# Altium PCB AOZ2262AQI-18_PCB.PcbDoc
Units mil, origin at the board's own origin, x right, y up, seen from the top; angles counter-clockwise.
Board outline 950 x 1115 mil, 2 copper layers (Top Layer, Bottom Layer); 13 components, 11 nets, 50 pads, 29 vias.
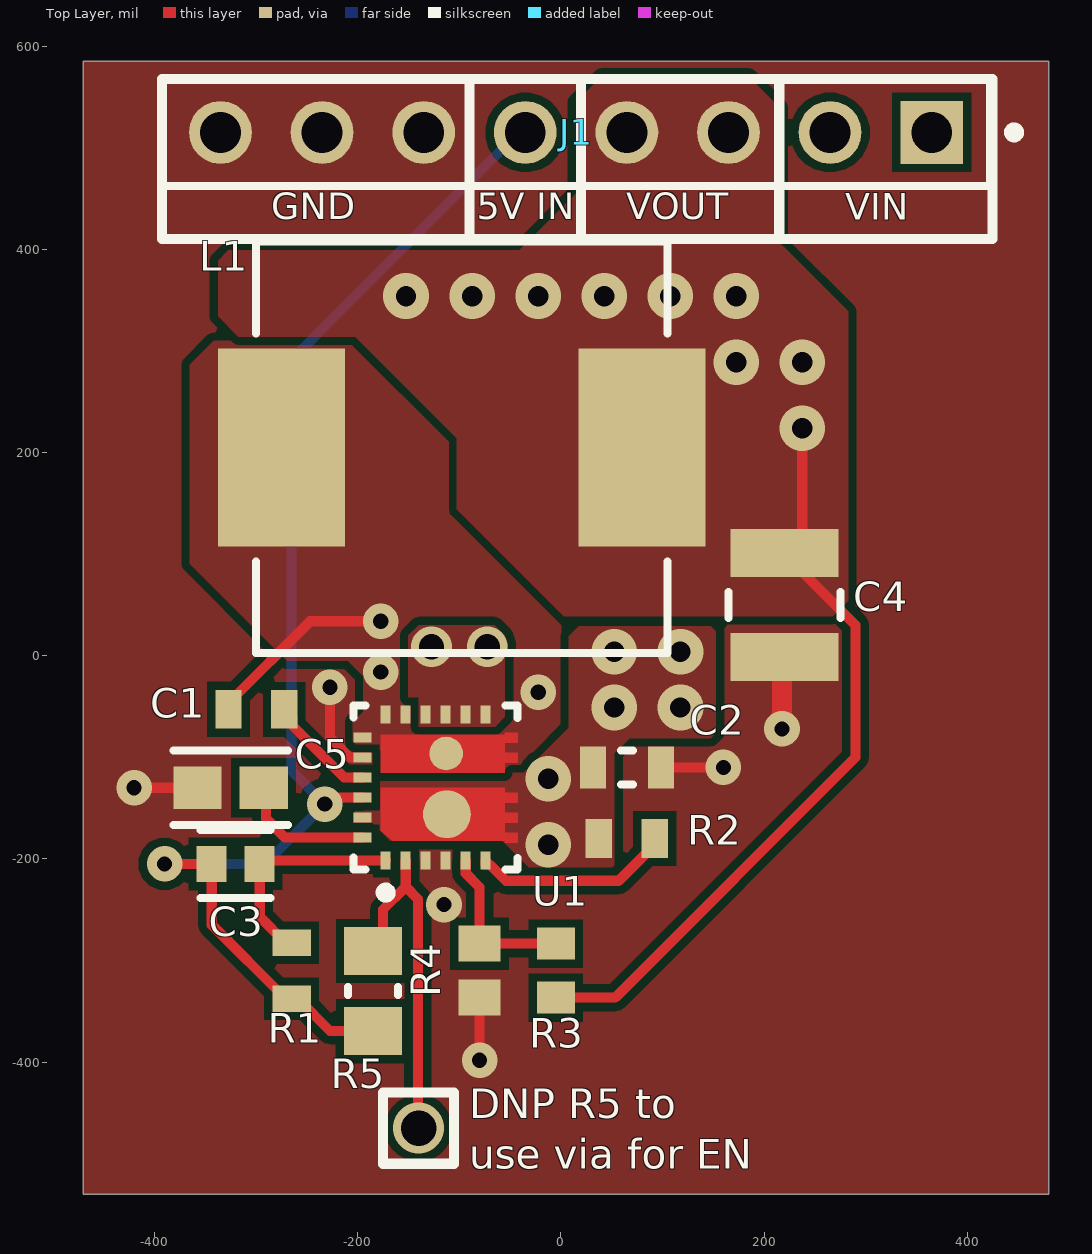
[diagram p0: Top Layer view]
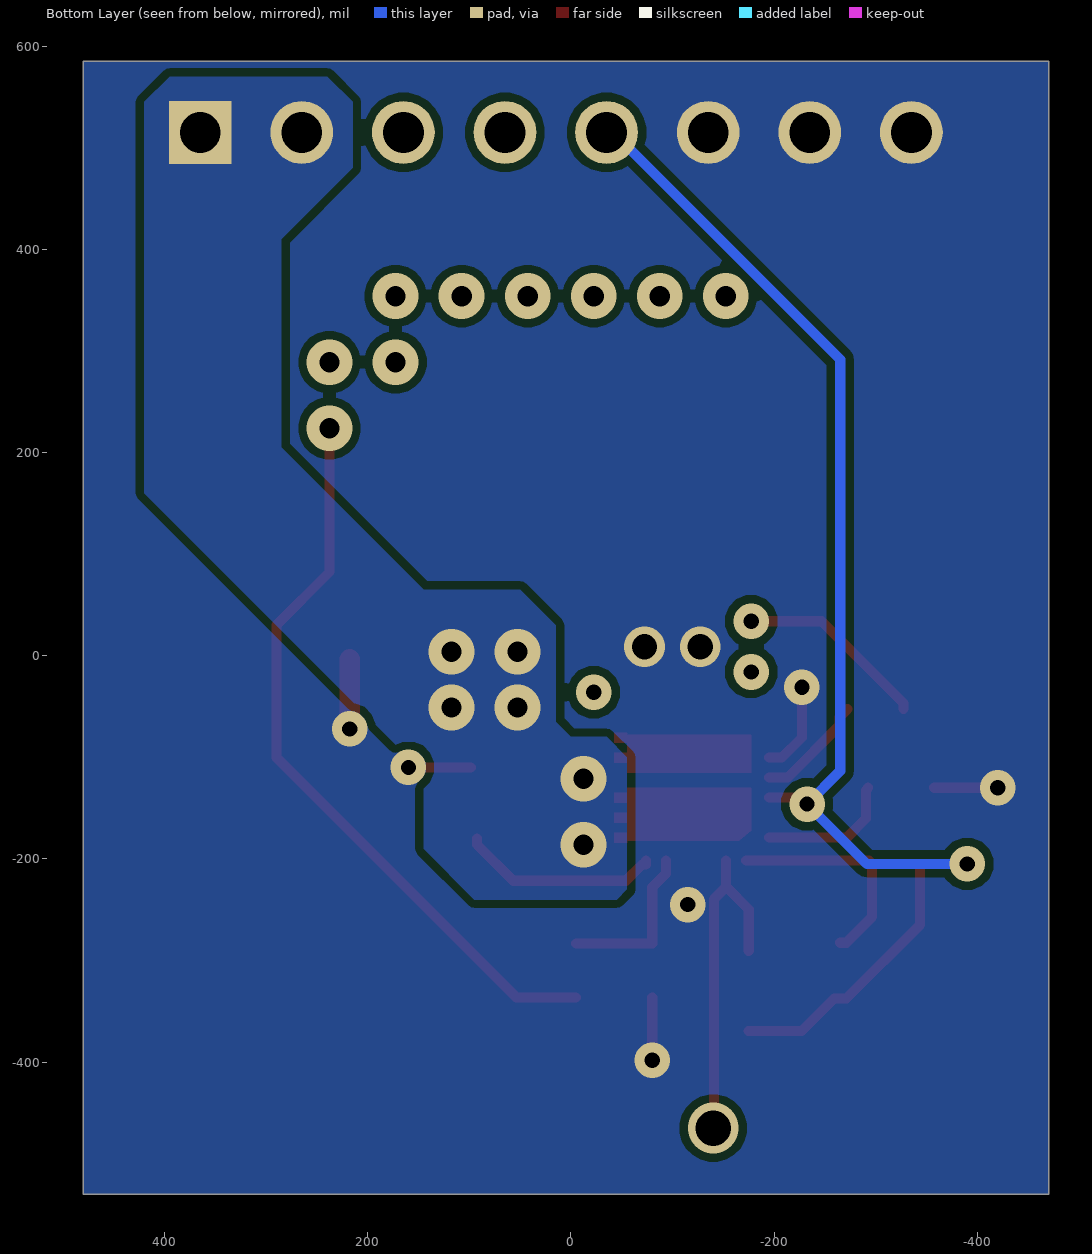
[diagram p1: Bottom Layer view, seen from below]
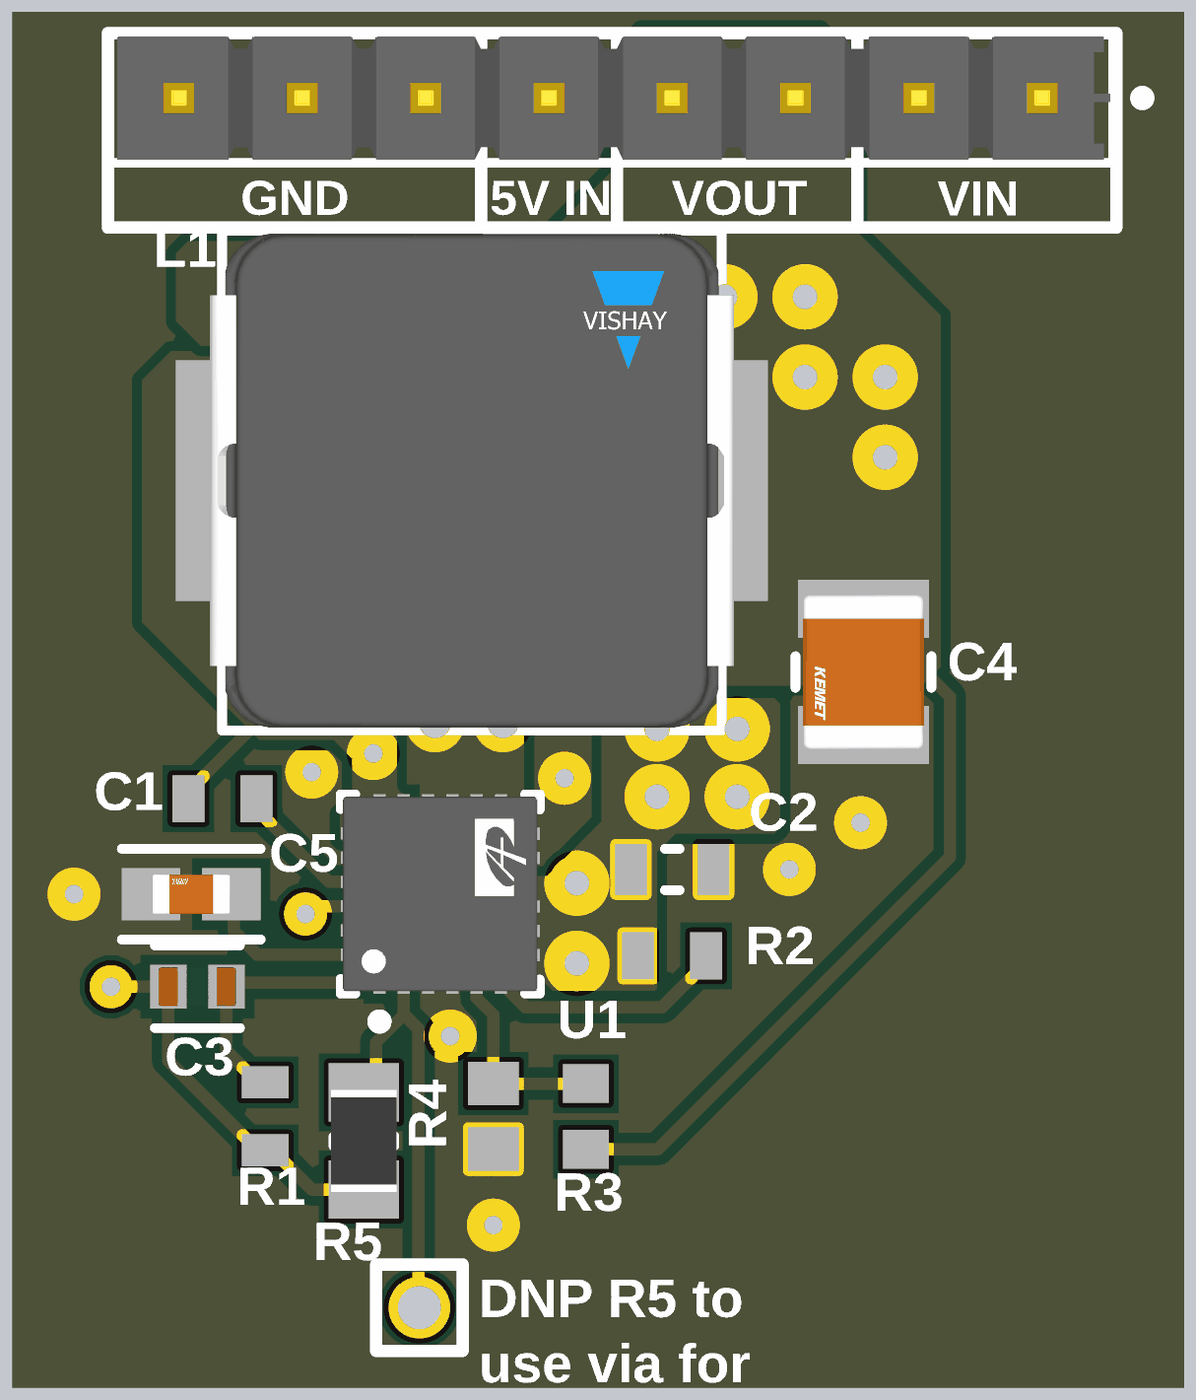
[diagram p2: 3D render of the assembled board from above, using the file's embedded part models]

## Layer stack, top to bottom
Top Solder: solder mask 0.4, Solder Resist, Dk 3.5
Top Layer: signal copper 1.4
Dielectric 1: dielectric 12.6, FR-4, Dk 4.8
Bottom Layer: signal copper 1.4
Bottom Solder: solder mask 0.4, Solder Resist, Dk 3.5

## Board outline
-470,-530 -470,585 480,585 480,-530

## Design rules (kind name [scope] priority, off if disabled: settings)
Clearance [All] p1: gap=8 ignorepadtopadclearanceinfootprint=TRUE except(0: Arc-Hole Track-Hole SMDPad-Hole THPad-Hole Via-Hole Fill-Hole Poly-Hole Region-Hole Text-Hole)
PolygonConnect [All] p1: connectstyle=Direct reliefconductorwidth=10 reliefentries=4 polygonreliefangle="90 Angle" airgapwidth=10
RoutingVias [All] p1: holewidth=15 width=35 viastyle="Through Hole" minholewidth=15 minwidth=35 maxholewidth=28 maxwidth=50
SolderMaskExpansion [All] p1: expansion=4 istentingtop=FALSE
Width [All] p1: maxlimit=100 minlimit=10 preferedwidth=10
30 further rules are at their usual default settings.

## Components (designator, comment, footprint, x,y, rotation, side; value= is the part's Value field where it differs from the comment)
C1 "100nF" 0603 -299.63,-52.61 r0 top
C2 "22uF" CAPC1608X100X20ML10 65,-110 r0 top
C3 "4.7uF" FP-C0603-CG-MFG -320,-205 r0 top
C4 "100uF" FP-C1210C107M9PACTU-MFG 220,50 r270 top
C5 "1nF" FP-0603-L_1_6_0_15-W_0_81-IPC_A -325,-130 r180 top
J1 "TSW-108-08-G-S" FP-TSW-108-08-G-S-MFG 15,515 r180 top
L1 "1uH" FP-IHLP-4040DZ-FP_3_175x4-MFG -97.5,205 r0 top
R1 "100K" 0603 -265,-310 r90 top
R2 "88K7 1%" 0603 65,-180 r0 top value="88700.00 Ohm"
R3 "105K" RESC1608X55X30NL15T15 -5,-310 r270 top
R4 "20K" RESC1609X50X30ML10T20 -80,-310 r90 top
R5 "0R" RESC2013X60X35ML10T20 -185,-330 r270 top
U1 "AOZ2262AQI-18" FP-QFN4x4B_23L_EP2_S-MFG -123.15,-129.84 r90 top

## Footprints (in the part's own frame and the unit in brackets; to place one, negate y for a bottom-side part, rotate by r counter-clockwise, add the part's x,y. Pads: shape width x height; smd on the part's side, far side on the other; paste and mask are expansions set on the pad)
0603 [mil]
  rect 26x38 smd: 1(-27.5,0) 2(27.5,0)
  body extent 0,0 10,10, height 10
CAPC1608X100X20ML10 [mm] "Chip Capacitor, 2-Leads, Body 1.70x0.90mm, IPC Low Density"
  rect 0.65x1.05 smd: 1(-0.85,0) 2(0.85,0)
  silkscreen extent -0.15,-0.43 0.15,0.43, body extent -0.85,-0.45 0.85,0.45, height 1
FP-0603-L_1_6_0_15-W_0_81-IPC_A [mil]
  rect 47.5x42.06 smd paste+0 mask+0: 1(-32.51,0) 2(32.51,0)
  silkscreen extent -56,-37 56,37, body extent -76,-41 76,41, height 10
FP-C0603-CG-MFG [mm]
  rect 0.75x0.9 smd paste+0 mask+0: 1(-0.6,0) 2(0.6,0)
  silkscreen extent -0.87,-0.85 0.87,0.85, body extent -1.2,-0.6 1.2,0.6, height 0.25
FP-C1210C107M9PACTU-MFG [mm]
  rect 1.2x2.7 smd paste+0 mask+0: 1(-1.3,0) 2(1.3,0)
  silkscreen extent -0.33,-1.4 0.33,1.4, body extent -2,-1.5 2,1.5, height 0.25
FP-IHLP-4040DZ-FP_3_175x4-MFG [mil]
  rect 125x195 smd paste+0 mask+0: 1(-177.5,0) 2(177.5,0)
  silkscreen extent -202,-202 202,202, body extent -244,-206 244,206, height 10
FP-QFN4x4B_23L_EP2_S-MFG [mm]
  rect 0.45x0.25 smd paste+0 mask+0: 1(-1.825,1.25) 2(-1.825,0.75) 3(-1.825,0.25) 4(-1.825,-0.25) 5(-1.825,-0.75) 6(-1.825,-1.25) 12(1.825,-1.25) 13(1.825,-0.75) 14(1.825,-0.25) 15(1.825,0.25) 16(1.825,0.75) 17(1.825,1.25)
  round 1.196 smd paste+0 mask+0: 7-8-9(-0.665,-0.281)
  round 0.841 smd paste+0 mask+0: 10-11(0.853,-0.261)
  rect 0.25x0.45 smd paste+0 mask+0: 18(1.25,1.825) 19(0.75,1.825) 20(0.25,1.825) 21(-0.25,1.825) 22(-0.75,1.825) 23(-1.25,1.825)
  Top Layer region: 0.37,1.38 1.32,1.38 1.32,-1.72 1.365,-1.72 1.365,-2.05 1.115,-2.05 1.115,-1.72 0.865,-1.72 0.865,-2.05 0.615,-2.05 0.615,-1.72 0.37,-1.72
  Top Layer region: 0,1.38 -1.08,1.38 -1.33,1.08 -1.33,-1.72 -1.385,-1.72 -1.385,-2.05 -1.135,-2.05 -1.135,-1.72 -0.885,-1.72 -0.885,-2.05 -0.635,-2.05 -0.635,-1.72 -0.385,-1.72 -0.385,-2.05 -0.135,-2.05 -0.135,-1.72 0,-1.72
  silkscreen extent -2.75,-2.05 2.05,2.05, body extent -2.15,-2.15 2.15,2.15, height 0.25
FP-TSW-108-08-G-S-MFG [mm]
  rect 1.57x1.57 hole 1.02 paste-2539.97 mask+0: 1(-8.89,0)
  round 1.57 hole 1.02 paste-2539.97 mask+0: 2(-6.35,0) 3(-3.81,0) 4(-1.27,0) 5(1.27,0) 6(3.81,0) 7(6.35,0) 8(8.89,0)
  silkscreen extent -11.08,-1.34 10.35,1.34, body extent -10.45,-1.44 10.45,1.44, height 0.25
RESC1608X55X30NL15T15 [mm] "Chip Resistor, 2-Leads, Body 1.60x0.80mm, IPC Medium Density"
  rect 0.8x0.95 smd: 1(-0.675,0) 2(0.675,0)
  body extent -0.87,-0.48 0.87,0.48, height 0.55
RESC1609X50X30ML10T20 [mm] "Chip Resistor, 2-Leads, Body 1.55x0.85mm, IPC Low Density"
  rect 0.9x1.05 smd: 1(-0.675,0) 2(0.675,0)
  body extent -0.82,-0.48 0.82,0.48, height 0.5
RESC2013X60X35ML10T20 [mm] "Chip Resistor, 2-Leads, Body 2.1x1.35mm, IPC Low Density"
  rect 1.2x1.45 smd: 1(-1,0) 2(1,0)
  silkscreen extent -0.1,-0.63 0.1,0.63, body extent -1.05,-0.68 1.05,0.67, height 0.6

## Part data
C1: library part "100nF 0603", "CAP 100nF 100V ±10% 0603 (1608 Metric) Thickness 1mm SMD", Case-EIA=0603, Case-Metric=1608, Rated Voltage="100 V", Tolerance=Â±10%, ComponentLink1Description=Link, ComponentLink1URL=https://www.digikey.com/en/products/detail/samsung-electro-mechanics/CL10B104KC8NNNC/5961291, Max Thickness="1 mm", Technology=SMT
C2: library part CMP-2000-05440-1, "Chip Capacitor, 22 uF, +/- 20%, 6.3 V, -55 to 85 degC, 1608 (0603 Metric), RoHS, Tape and Reel", Capacitance=22µF, Manufacturer=TDK, Operating Temperature=-55degC~85degC, Package / Case=0603(1608Metric), Package Description="2-Pin Surface Mount Device, Body 1.6 x 0.8 mm", Package Reference=603, PCN Part Number=MLCCPartNumberChange30/Nov/2012, Ratings=-, Standard Package=1, Temperature Coefficient=X5R, Tolerance=±20%, Voltage - Rated=6.3V, Applications=GeneralPurpose, Category=Capacitors, Datasheet URL=http://www.farnell.com/datasheets/1913358.pdf, Datasheet Version=Mar-15, Design Resources=20WNon-IsolatedBuckLEDDriverUsingPLLNK460KG, Family=CeramicCapacitors, Features=-, Height - Seated (Max)=-, Kits=445-9003-KIT-ND-KITCAPCERHICAPMLCCSMD, Lead Spacing=-, Lead Style=-, Manufacturer URL=http://www.tdk.com/, Mounting Type=SurfaceMount,MLCC, Online Catalog=CSeries,GeneralPurpose, Other Names=445-8028-1, Packaging=CutTape(CT), Product Training Modules=CSeriesGeneralApplicationsSEAT,CCV,andTVCLDesignToolsGuidetoReplacinganElectrolyticCapacitorwithanMLCC, RoHS Information=RoHSCertificate-MLCC, Series=C, Size / Dimension="0.063\"Lx0.031\"W(1.60mmx0.80mm)", Thickness (Max)="0.039\"(1.00mm)"
C3: library part CMP-2006-02256-2, "CAP CER 4.7UF 6.3V X5R 0603", Manufacturer=Kemet, Manufacturer Part Number=C0603C475K9PACTU, Package=C0603-CG, Temperature="-55°C to +85°C", Temperature Characteristic=X5R, Temperature Coefficient=15%, Temperature Range High=+85°C, Temperature Range Low=-55°C, Tolerance=10%, Voltage Rating=6.3V, Automotive=No, Capacitance=4.7uF, Category=Cap, ComponentLink2Description=Datasheet, ComponentLink2URL=https://content.kemet.com/datasheets/KEM_C1006_X5R_SMD.pdf, Device Class L1="Passive Components", Device Class L2=Capacitors, Device Class L3="Ceramic Capacitors", Digikey Description="CAP CER 4.7UF 6.3V X5R 0603", Height=0.9mm, Ipc Land Pattern Name=CAPC16080X80, Lead Free=Yes, Material=Ceramic, Mouser Description="Multilayer Ceramic Capacitors MLCC - SMD/SMT 6.3volts 4.7uF X5R 10%", Octopart=https://octopart.com/c0603c475k9pactu-kemet-104242, RoHS=TRUE
C4: library part CMP-2000-06018-2, "CAP CER 100UF 6.3V X5R 1210", Case Code (Imperial)=1210, Case Code (Metric)=3225, Dielectric=X5R, Dielectric Material=Ceramic, Max Operating Temperature=85°C, Min Operating Temperature=-55°C, Package Quantity=1, Tolerance=20%, VOLTAGE=6.3V, Capacitance=100uF, Case/Package=1210, Construction=Flat, Contact Plating=Tin, Depth=2.5mm, Dissipation Factor=5%, Height=2.5mm, Lead Free="Lead Free", Length=3.2mm, Mount="Surface Mount", Number of Pins=2, Packaging="Tape and Reel", Radiation Hardening=No, REACH SVHC="No SVHC", RoHS Compliant=Yes, Series=C, Termination=SMD/SMT, Thickness=0.11inch, Voltage Rating=6.3V, Voltage Rating (DC)=6.3V, Width=2.5mm
C5: library part CMP-2006-04378-2, "General Purpose Ceramic Capacitor, 0603, 1nF, 10%, X7R, 15%, 50V", Case Code (Imperial)=0603, Case Code (Metric)=1608, Dielectric=X7R, Dielectric Material=Ceramic, Max Operating Temperature=125°C, Min Operating Temperature=-55°C, Package Quantity=4000, Tolerance=10%, VOLTAGE=50V, Capacitance=1nF, Case/Package=0603, Construction=Flat, Contact Plating=Tin, Depth=0.81mm, Height=0.9mm, Lead Free="Lead Free", Length=1.6mm, Mount="Surface Mount", Number of Pins=2, Packaging="Tape and Reel", Radiation Hardening=No, REACH SVHC="No SVHC", RoHS Compliant=Yes, Series=-, Termination=SMD/SMT, Thickness=0.035inch, Voltage Rating=50V, Voltage Rating (DC)=50V, Weight=7.1E-05oz, Width=0.032inch
J1: library part CMP-02766-000001-1, "CONN HEADER VERT 8POS 2.54MM", Manufacturer=Samtec, Temperature="-55°C to +125°C", Temperature Range High=+125°C, Temperature Range Low=-55°C, Automotive=No, Category=Conn, ComponentLink2Description=Datasheet, ComponentLink2URL=http://suddendocs.samtec.com/catalog_english/tsw_th.pdf, Conn Gender=Male, Conn Orientation=Straight, Contact Material=Gold,Nickel, Device Class L1=Connectors, Device Class L2="Headers and Wire Housings", Device Class L3=unset, Digikey Description="CONN HEADER VERT 8POS 2.54MM", Footprint Url=http://suddendocs.samtec.com/prints/tsw-xxx-xx-x-x-xx-xxx-footprint.pdf, Height=8.71mm, Lead Free=Yes, Manufacturer Part Number=TSW-108-08-G-S, Mouser Description="TSW - Samtec 2.54mm Pin Header 13.46mm Overall Pin Length 5.08mm Tail", Number Of Contacts=8, Number Of Rows=1, Octopart=https://octopart.com/tsw-108-08-g-s-samtec-272653, Package=TSW-108-08-G-S, Pitch=2.54mm, RoHS=TRUE
L1: library part CMP-02424-000442-1, "Commercial Inductors, Low DCR Series 1uH 25A 2.5mΩ 20% / IHLP4040DZER1R0M11", Case Code (Imperial)=4040, Current Rating=25A, DC Resistance (DCR)=2.5mR, Inductance Tolerance=20%, Max DC Current=20A, Max Operating Temperature=125°C, Min Operating Temperature=-55°C, Package Quantity=1, Self Resonant Frequency=1MHz, Test Frequency=100kHz, Case/Package=4040, Core Material=Metal, Depth=10.3mm, Height=4mm, Height - Seated (Max)=0.157inch, Inductance=1uH, Lead Free="Lead Free", Length=0.43inch, Military Standard=Not, Mount="Surface Mount", Number of Pins=2, Packaging="Tape and Reel", Radiation Hardening=No, RMS Current (Irms)=25A, Saturation Current=20A, Shielding=Shielded, Termination=SMD/SMT, Tolerance=20%, Width=0.405inch
R1: library part "100K 0603", "ERJ-3EKF1003V-100k 0603", Manufacturer=Panasonic, Part Number=ERJ-3EKF1003V, ComponentLink1Description=Link, ComponentLink1URL=https://www.digikey.com/en/products/detail/yageo/RC0603FR-07100KL/726889
R2: library part "88K7 0603", "88K7 0.1W 1% 0603 (1608 Metric)  SMD", Case-EIA=0603, Case-Metric=1608, Power="0.1 W", Tolerance="1 %", ComponentLink1Description=Link, ComponentLink1URL=https://www.digikey.com/en/products/detail/yageo/RC0603FR-0788K7L/727415, Technology=SMT
R3: library part CMP-2000-00190-1, "ERJ-3EKF1053V / 105K 0603", Manufacturer=Panasonic, Part Number=ERJ-3EKF1053V
R4: library part CMP-1012-00655-2, "CRCW060320K0FKEB / 20K 0603", Manufacturer="Vishay Dale", Part Number=CRCW060320K0FKEB
R5: library part CMP-2100-03673-1, "Chip Resistor, 0 Ohm, Jumper, +/- 5%, 0.125 W, -55 to 155 degC, 0805 (2012 Metric), RoHS, Tape and Reel / RC0805JR-070RL", Case Code (Imperial)=0805, Case Code (Metric)=2012, Manufacturer=Yageo, Max Operating Temperature=155degC, Min Operating Temperature=-55degC, Package Description="2-Pin Surface Mounted Device, Body 2 x 1.25 mm", Power Rating=125mW, Resistance=0mOhm, Temperature Coefficient=200ppm/degreesC, Tolerance=5%, Voltage Rating=150V, Case/Package=0805, Composition=ThickFilm, Contact Plating=Tin, Datasheet URL=http://www.yageo.com/NewPortal/yageodocoutput?fileName=/pdf/R-Chip/PYu-RC_Group_51_RoHS_L_5.pdf, Datasheet Version="Rev. 5, 10/2016", Depth=1.25mm, Height=0.5mm, Lead Free=LeadFree, Length=2mm, Manufacturer URL=http://www.yageo.com/, Military Standard=Not, Number of Pins=2, Package Reference=0805, Packaging=TapeandReel, Radiation Hardening=No, REACH SVHC=Unknown, RoHSCompliant=true, Termination=SMD/SMT, Voltage Rating (DC)=150V, Width=1.25mm
U1: library part CMP-83911-000001-1, "POWER IC EZBUCK"

## Via types
v1: diameter 45, hole 20, Top Layer to Bottom Layer, 15 vias
v2: diameter 35, hole 15, Top Layer to Bottom Layer, 11 vias
v3: diameter 40, hole 25, Top Layer to Bottom Layer, 2 vias
v4: diameter 50, hole 35, Top Layer to Bottom Layer, 1 vias

## Nets (pads, with @x,y where several pads share a name; then routed paths per layer and width w, separated by ;. In a path a pad name is that pad's centre, name@x,y a point inside that pad or via, vN(x,y) a via of type N, cw(c..) or ccw(c..) an arc to the next point about the centre after c; other vN are vias at no path point)
GND: C2.2 C4.2 C5.2 J1.6 J1.7 J1.8 R4.1 U1.3 U1.4 U1.12 U1.13 U1.14 U1.15 U1.19 | length 347.4
  Top Layer w10: v2(-420,-130) C5.2 ; v2(-227.32,-31.08) -227.32,-80.47 -207.56,-100.24 -195.08,-100.24 U1.19 ; v2(-80,-398.11) R4.1 ; C2.2 v2(160,-110) ; C4.2@217.68,-3.5 C4.2
  Top Layer w20: v2(217.68,-72.11) C4.2@217.68,-3.5
  other v2: -115,-245
  other v3: -127.32,8.92 -72.32,8.92
NetC1_1: C1.1 L1.1 U1.10-11 U1.16 U1.17 U1.18 | length 189.2
  Top Layer w10: C1.1 -327.13,-46.61 -246.59,33.92 v2(-177.32,33.92)
  other v2: -22.32,-36.08 -177.32,-16.08
NetC1_2: C1.2 U1.20 | length 110
  Top Layer w10: C1.2 -264.13,-60.61 -264.13,-69.12 -213.33,-119.92 -195.08,-119.92 U1.20
NetC3_2: C3.2 R1.2 U1.1 | length 219.4
  Top Layer w10: R1.2 -271,-282.5 -296.38,-257.12 C3.2 -293.07,-201.69 U1.1
NetC5_1: C5.1 U1.23 | length 134.2
  Top Layer w10: C5.1 -290.34,-132.14 -290.34,-160.17 -271.46,-179.06 U1.23
NetR2_2: R2.2 U1.6 | length 197.6
  Top Layer w10: U1.6 -73.94,-205.47 -73.86,-205.55 -70.08,-205.55 -54.05,-221.58 56.92,-221.58 92.5,-186 R2.2
NetR3_1: R3.1 R4.2 U1.5 | length 162.4
  Top Layer w10: U1.5 -93.62,-214.17 -80,-227.79 R4.2 R3.1
NetR5_1: R5.1 U1.2 | length 340.9
  Top Layer w10: R5.1@-175,-290.63 -175,-249.9 -152.68,-227.58 ; U1.2 -152.68,-227.58 ; v4(-140,-465) -140.65,-464.35 -140.65,-239.61 -152.68,-227.58
V5P0_AUX: C3.1 J1.5 R1.1 R5.2 U1.21 | length 1313.9
  Top Layer w10: v2(-390,-205) C3.1 -343.62,-264.88 -271,-337.5 R1.1 -259,-337.5 -227.13,-369.37 R5.2@-175,-369.37 ; v2(-232.32,-146.08) -225.56,-146.08 -219.16,-139.68 U1.21
  Bottom Layer w10: v2(-390,-205) -291.24,-205 v2(-232.32,-146.08) -265,-113.4 -265,291.44 -41.44,515 J1.5
V5P0_Servo: C4.1 J1.3 J1.4 L1.2 R3.2 | length 738.6
  Top Layer w10: R3.2 53.43,-336.57 290,-100 290,30 237.68,82.32 v1(237.68,223.92)
  other v1: 172.68,288.92 237.68,288.92 -152.32,353.92 -87.32,353.92 -22.32,353.92 42.68,353.92 107.68,353.92 172.68,353.92
VCC_BATT: C2.1 J1.1 J1.2 R2.1 U1.7-8-9 U1.22
  other v1: -12.32,-186.08 -12.32,-121.08 52.68,-51.08 117.68,-51.08 52.68,3.92 117.68,3.92

## Polygon pours and split planes (outlines as drawn)
V5P0_Servo on Top Layer "V5P0_SERVO_L01_P000" (solid, pour order 0): -50,390 15,455 15,545 40,570 185,570 215,540 215,406.6 222.68,398.92 213.76,390
GND on Top Layer "GND_L01_P007" (solid, pour order 7): -470,-530 -470,585 480,585 480,-530
V5P0_Servo on Top Layer "V5P0_SERVO_L01_P003" (solid, pour order 3): -102.32,143.92 2.68,38.92 267.68,38.92 282.68,53.92 282.68,338.92 222.68,398.92 -327.32,398.92 -337.32,388.92 -337.32,333.92 -317.32,313.92 -202.32,313.92 -102.32,213.92
NetC1_1 on Top Layer "NETC1_1_L01_P004" (solid, pour order 4): -269.63,-5.11 -365,90.26 -365,286.54 -341.65,309.89 -209.63,309.89 -109.63,209.89 -109.63,139.89 0.37,29.89 0.37,-80.11 -33.86,-114.35 -175,-114.35 -175,-95.65 -180.41,-90.24 -199.5,-90.24 -204.63,-85.11 -204.63,-65.11 -194.63,-55.11 -194.63,-20.11 -209.63,-5.11
GND on Top Layer "GND_L01_P001" (solid, pour order 1): -140.81,-70.81 -65.81,-70.81 -55,-60 -55,20 -65,30 -140,30 -150,20 -150,-61.62
VCC_BATT on Top Layer "VCC_BATT_L01_P002" (solid, pour order 2): 52.68,-96.08 67.68,-81.08 147.68,-81.08 152.68,-76.08 152.68,23.92 147.68,28.92 17.68,28.92 7.68,18.92 7.68,-71.08 -36.56,-115.32 -177.7,-115.32 -177.7,-151.15 -200.73,-151.15 -204.07,-154.49 -204.07,-164.33 -185.77,-164.33 -167.85,-182.25 -57.81,-182.25 -18.98,-221.08 37.68,-221.08 52.68,-206.08
VCC_BATT on Bottom Layer "VCC_BATT_L02_P005" (solid, pour order 5): 285,410 215,480 215,545 240,570 395,570 420,545 420,160 145,-115 145,-190 95,-240 -45,-240 -55,-230 -55,-100 -35,-80 0,-80 15,-65 15,30 50,65 145,65 285,205
GND on Bottom Layer "GND_L02_P006" (solid, pour order 6): -470,-530 -470,585 480,585 480,-530

## Silkscreen, mask and mechanical layers (free items; w line width, h text height)
Top Overlay:
  lines w10: -90,410 -392.48,410 -392.48,567.56 -90,567.56 ; -90,410 -90,567.56 ; -90,410 20,410 ; -90,410 -90,567.56 ; -90,567.56 20,567.56 ; 20,410 215,410 ; 20,410 20,567.56 ; 20,410 20,567.56 ; 20,567.56 215,567.56 ; 215,410 215,567.56 ; 215,410 425,410 425,567.56 215,567.56 ; 215,410 215,567.56 ; -175,-500 -105,-500 -105,-430 -175,-430 -175,-500
  text "GND" at -285,420.48 h45
  text "5V IN" at -82.82,420.48 h45
  text "VOUT" at 64.51,420.48 h45
  text "VIN" at 280,420 h45
  text "DNP R5 to  / use via for EN" at -90,-515 h50
Mechanical 15:
  the board outline again, w10